# Altium PCB Liquid_level.PcbDoc
Units mm, origin at the board's own origin, x right, y up, seen from the top; angles counter-clockwise.
Board outline 23.94 x 68.42 mm, 2 copper layers (Top Layer, Bottom Layer); 4 components, 5 nets, 10 pads, 0 vias.
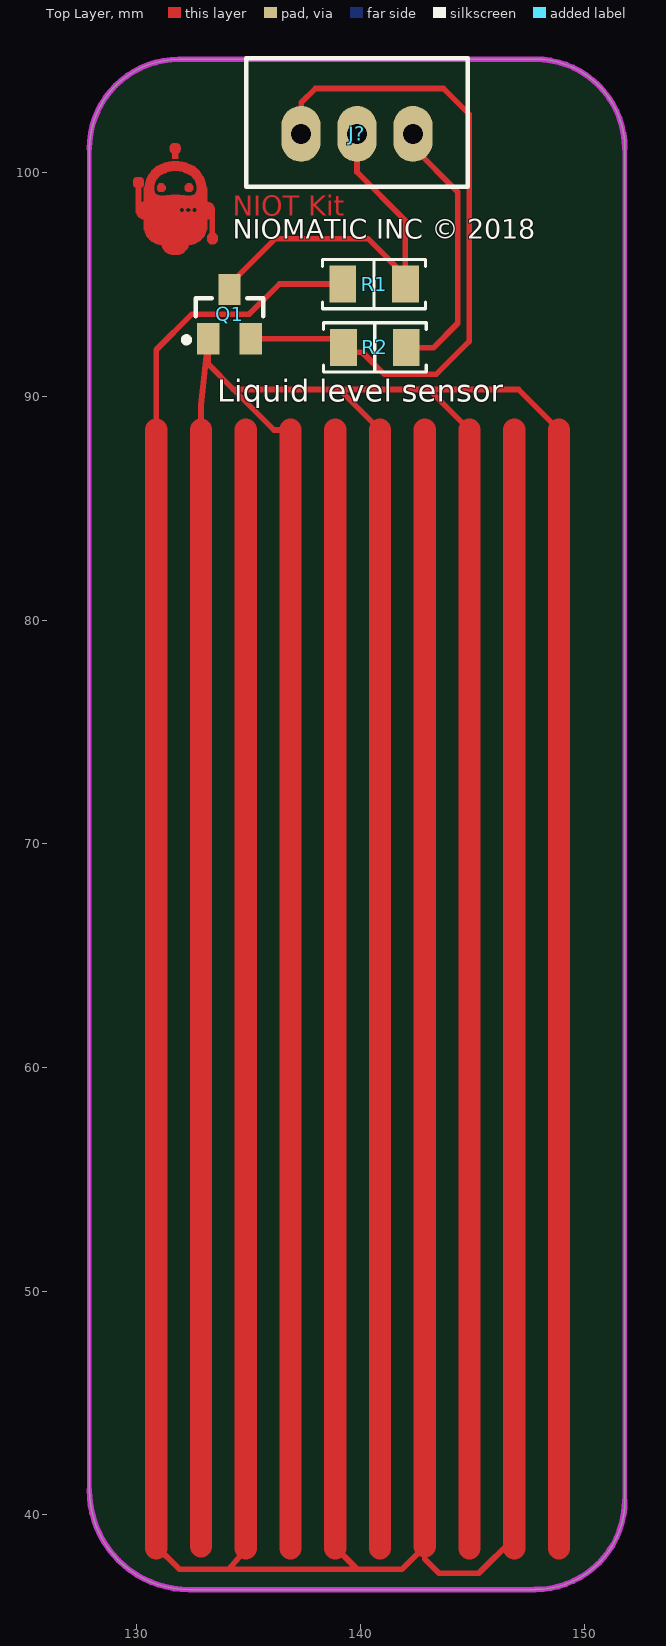
[diagram p0: Top Layer view]
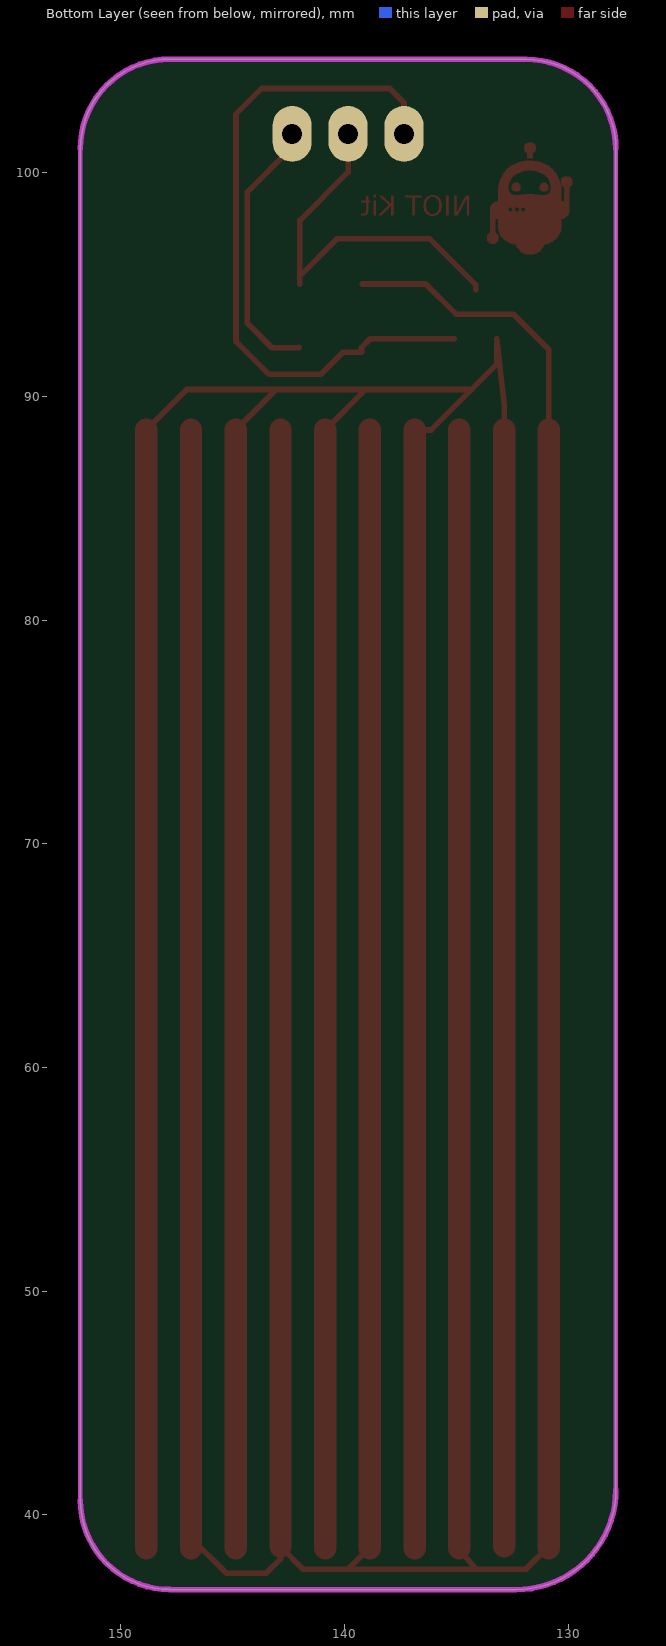
[diagram p1: Bottom Layer view, seen from below]
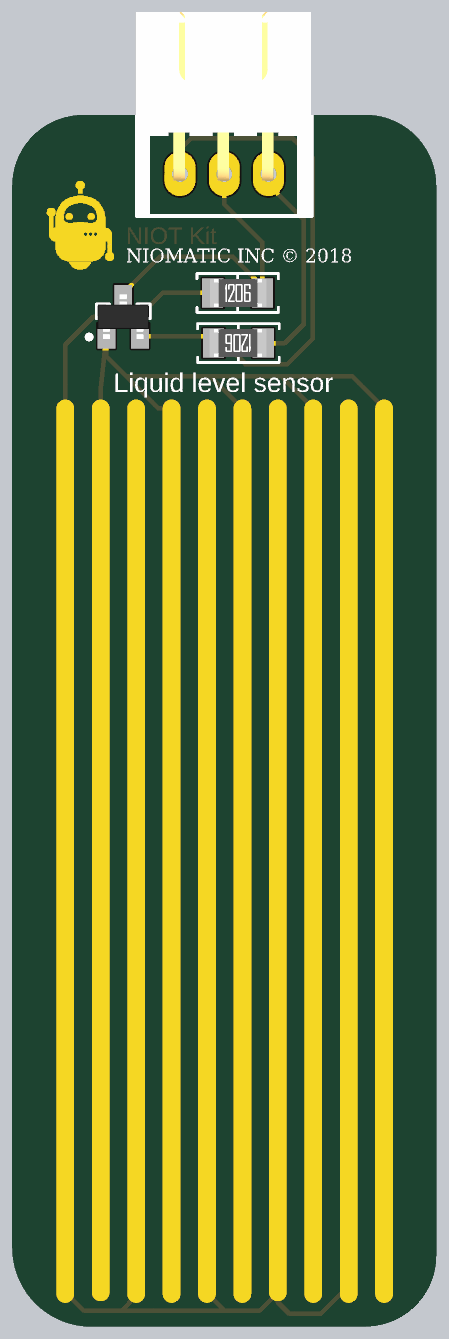
[diagram p2: 3D render of the assembled board from above, using the file's embedded part models]

## Layer stack, top to bottom
Top Solder: solder mask 0.0102, Solder Resist, Dk 3.5
Top Layer: signal copper 0.0356
Dielectric 1: dielectric 0.32, FR-4, Dk 4.8
Bottom Layer: signal copper 0.0356
Bottom Solder: solder mask 0.0102, Solder Resist, Dk 3.5

## Board outline
127.876,41.117 127.876,101.065 cw(c131.876,101.065) 131.876,105.065 131.876,105.074 147.816,105.074 cw(c147.816,101.074) 151.816,101.074 151.816,40.664 cw(c147.816,40.664) 147.816,36.664 147.816,36.655 132.339,36.655 cw(c132.339,41.117)

## Design rules (kind name [scope] priority, off if disabled: settings)
Clearance [All] p1: gap=0.254 ignorepadtopadclearanceinfootprint=FALSE except(0: Arc-Hole Track-Hole SMDPad-Hole THPad-Hole Via-Hole Fill-Hole Poly-Hole Region-Hole Text-Hole)
PolygonConnect [All] p1: connectstyle=Relief reliefconductorwidth=0.254 reliefentries=4 polygonreliefangle="90 Angle" airgapwidth=0.254
RoomDefinition Liquid_level [InComponentClass('Liquid_level')] p1: confinementstyle=ConfineIn formatcopy=TRUE lockcomponents=FALSE outline 0,0 50.8,0 50.8,25.4 0,25.4
RoutingVias [All] p1: holewidth=0.711 width=1.27 viastyle="Through Hole" minholewidth=0.711 minwidth=1.27 maxholewidth=0.711 maxwidth=1.27
SolderMaskExpansion [All] p1: expansion=0.102
Width [All] p1: maxlimit=0.254 minlimit=0.254 preferedwidth=0.254
30 further rules are at their usual default settings.

## Components (designator, comment, footprint, x,y, rotation, side; value= is the part's Value field where it differs from the comment)
J? "Header" "JST XH B3B-XH-A - RIGHT" 139.846,101.736 r180 top
Q1 "2N3904" SOT23 134.144,93.678 r90 top
R1 "100R" "RES 1206/3216" 140.604,95.018 r0 top value=1K
R2 "10K" "RES 1206/3216" 140.644,92.188 r180 top value=1K

## Footprints (in the part's own frame and the unit in brackets; to place one, negate y for a bottom-side part, rotate by r counter-clockwise, add the part's x,y. Pads: shape width x height; smd on the part's side, far side on the other; paste and mask are expansions set on the pad)
"JST XH B3B-XH-A - RIGHT" [mm]
  oval 1.75x2.5 hole 0.9: 1(-2.5,0) 2(0,0) 3(2.5,0)
  silkscreen extent -4.95,-3.38 4.95,2.38, body extent -4.9,-9.15 5,2.35, height 6.1
"RES 1206/3216" [mm] "Chip Resistor, 2-Leads, Body 3.13x1.55mm, IPC Medium Density"
  rect 1.2x1.65 smd: 1(-1.4,0) 2(1.4,0)
  silkscreen extent -2.3,-1.1 2.3,1.1, body extent -1.57,-0.8 1.62,0.8, height 0.6
SOT23 [mm]
  rect 1.4x1 smd: B(-1.1,0.95) C(1.1,0) E(-1.1,-0.95)
  silkscreen extent -1.27,-1.5 0.7,2.05, body extent -1.27,-1.46 1.27,1.46, height 1

## Part data
J?: library part "3 Pin"
Q1: library part 2N2222, "NPN", De="Seyed Mohsen Ghasemian", E-mail=picpars@gmail.com, web=www.picpars.com
R1 R2: library part Resistor, "SMT Resistor"

## Nets (pads, with @x,y where several pads share a name; then routed paths per layer and width w, separated by ;. In a path a pad name is that pad's centre, name@x,y a point inside that pad or via, vN(x,y) a via of type N, cw(c..) or ccw(c..) an arc to the next point about the centre after c; other vN are vias at no path point)
GND: J?.1 R2.1 | length 12.1
  Top Layer w0.254: R2.1 142.044,92.177 143.256,92.177 144.348,93.269 144.348,99.141 142.346,101.143 J?.1
PROBE1: Q1.B | length 280.5
  Top Layer w0.254: 132.871,88.5 132.871,89.621 Q1.B 133.194,91.44 134.324,90.31 ; 136.871,88.5 136.134,88.5 134.324,90.31 ; 140.871,88.5 139.061,90.31 ; 144.871,88.5 143.061,90.31 ; 148.871,88.5 147.061,90.31 143.061,90.31 ; 134.324,90.31 139.061,90.31 ; 139.061,90.31 143.061,90.31
  Top Layer w1: 132.871,38.59 132.871,88.5 ; 136.871,38.5 136.871,88.5 ; 140.871,38.5 140.871,88.5 ; 144.871,38.5 144.871,88.5 ; 148.871,38.5 148.871,88.5
PROBE2: R1.1 | length 533.3
  Top Layer w0.254: 134.871,88.5 134.871,38.5 134.871,38.45 134.112,37.567 ; 138.871,88.5 138.871,38.548 139.852,37.567 ; R1.1 139.204,95.021 136.373,95.021 135.026,93.675 132.461,93.675 130.871,92.085 130.871,88.5 130.871,38.598 131.902,37.567 134.112,37.567 ; 142.871,88.5 142.871,38.59 142.871,38.579 ; 146.871,88.5 146.871,38.972 145.288,37.389 143.51,37.389 142.871,38.028 142.871,38.579 ; 134.112,37.567 139.852,37.567 ; 139.852,37.567 141.859,37.567 142.871,38.579
  Top Layer w1: 130.871,38.5 130.871,88.5 ; 134.871,38.5 134.871,88.5 ; 138.871,38.5 138.871,88.5 ; 142.871,38.59 142.871,88.5 ; 146.871,38.5 146.871,88.5
SIG: J?.3 Q1.E R2.2 | length 31
  Top Layer w0.254: Q1.E 138.854,92.578 R2.2 139.244,91.973 140.08,91.973 141.072,90.982 143.382,90.982 144.856,92.456 144.856,102.616 143.713,103.759 137.981,103.759 137.346,103.124 J?.3
VCC: J?.2 Q1.C R1.2 | length 17.2
  Top Layer w0.254: Q1.C 134.144,94.994 136.2,97.05 140.33,97.05 R1.2@142.004,95.376 ; J?.2 139.846,100.024 142.004,97.866 R1.2@142.004,95.376 ; R1.2 R1.2@142.004,95.376
copper on no net: | length 380
  Top Layer w0.025: 129.836,99.469 130.319,99.469 ; 129.836,99.495 130.319,99.495 ; 129.836,99.52 130.319,99.52 ; 129.836,99.545 130.319,99.545 ; 129.836,99.571 130.319,99.571 ; 129.836,99.596 130.319,99.596 ; 129.836,99.622 130.319,99.622 ; 129.836,99.647 130.319,99.647 ; 129.836,99.672 130.319,99.672 ; 129.862,99.418 130.294,99.418 ; 129.862,99.444 130.294,99.444 ; 129.862,99.698 130.294,99.698 ; 129.862,99.723 130.294,99.723 ; 129.887,99.393 130.268,99.393 ; 129.887,99.749 130.268,99.749 ; 129.913,99.368 130.243,99.368 ; 129.913,99.774 130.243,99.774 ; 129.963,98.225 133.494,98.225 ; 129.963,98.25 131.97,98.25 ; 129.963,98.275 131.945,98.275 ; 129.963,98.301 131.919,98.301 ; 129.963,98.326 131.919,98.326 ; 129.963,98.352 131.919,98.352 ; 129.963,98.377 131.919,98.377 ; 129.963,98.402 131.945,98.402 ; 129.963,98.428 131.97,98.428 ; 129.963,98.453 133.469,98.453 ; 129.963,98.479 133.469,98.479 ; 129.963,98.504 133.443,98.504 ; 129.963,98.529 133.443,98.529 ; 129.963,98.555 133.418,98.555 ; 129.963,98.58 133.392,98.58 ; 129.963,98.606 133.367,98.606 ; 129.963,98.631 133.342,98.631 ; 129.963,98.656 133.316,98.656 ; 129.963,98.682 133.265,98.682 ; 129.963,98.707 130.192,98.707 ; 129.963,98.733 130.192,98.733 ; 129.963,98.758 130.192,98.758 ; 129.963,98.783 130.192,98.783 ; 129.963,98.809 130.192,98.809 ; 129.963,98.834 130.192,98.834 ; 129.963,98.86 130.192,98.86 ; 129.963,98.885 130.192,98.885 ; 129.963,98.91 130.192,98.91 ; 129.963,98.936 130.192,98.936 ; 129.963,98.961 130.192,98.961 ; 129.963,98.987 130.192,98.987 ; 129.963,99.012 130.192,99.012 ; 129.963,99.037 130.192,99.037 ; 129.963,99.063 130.192,99.063 ; 129.963,99.088 130.192,99.088 ; 129.963,99.114 130.192,99.114 ; 129.963,99.139 130.192,99.139 ; 129.963,99.164 130.192,99.164 ; 129.963,99.19 130.192,99.19 ; 129.963,99.215 130.192,99.215 ; 129.963,99.241 130.192,99.241 ; 129.963,99.266 130.192,99.266 ; 129.963,99.291 130.192,99.291 ; 129.963,99.317 130.192,99.317 ; 129.963,99.342 130.192,99.342 ; 129.963,99.799 130.192,99.799 ; 129.989,98.148 133.494,98.148 ; 129.989,98.174 133.494,98.174 ; 129.989,98.199 133.494,98.199 ; 130.014,98.123 133.494,98.123 ; 130.04,98.072 133.494,98.072 ; 130.04,98.098 133.494,98.098 ; 130.065,98.047 133.494,98.047 ; 130.09,98.021 133.494,98.021 ; 130.116,97.996 133.494,97.996 ; 130.167,97.971 133.494,97.971 ; 130.217,97.945 133.24,97.945 ; 130.268,98.707 133.164,98.707 ; 130.319,97.463 133.138,97.463 ; 130.319,97.488 133.138,97.488 ; 130.319,97.513 133.138,97.513 ; 130.319,97.539 133.138,97.539 ; 130.319,97.564 133.138,97.564 ; 130.319,97.59 133.138,97.59 ; 130.319,97.615 133.138,97.615 ; 130.319,97.64 133.138,97.64 ; 130.319,97.666 133.138,97.666 ; 130.319,97.691 133.138,97.691 ; 130.319,97.717 133.138,97.717 ; 130.319,97.742 133.138,97.742 ; 130.319,97.767 133.138,97.767 ; 130.319,97.793 133.138,97.793 ; 130.319,97.818 133.138,97.818 ; 130.319,97.844 133.138,97.844 ; 130.319,97.869 133.138,97.869 ; 130.319,97.894 133.138,97.894 ; 130.319,97.92 133.138,97.92 ; 130.319,98.733 133.138,98.733 ; 130.319,98.758 133.138,98.758 ; 130.319,98.783 133.138,98.783 ; 130.319,98.809 133.138,98.809 ; 130.319,98.834 133.138,98.834 ; 130.319,98.86 133.138,98.86 ; 130.319,98.885 133.138,98.885 ; 130.319,98.91 133.138,98.91 ; 130.319,98.936 133.138,98.936 ; 130.319,98.961 133.138,98.961 ; 130.319,98.987 131.005,98.987 ; 130.319,99.012 130.929,99.012 ; 130.319,99.037 130.878,99.037 ; 130.319,99.063 130.852,99.063 ; 130.319,99.088 130.827,99.088 ; 130.319,99.114 130.802,99.114 ; 130.319,99.139 130.802,99.139 ; 130.319,99.164 130.776,99.164 ; 130.319,99.19 130.776,99.19 ; 130.319,99.215 130.776,99.215 ; 130.319,99.241 130.776,99.241 ; 130.319,99.266 130.776,99.266 ; 130.319,99.291 130.776,99.291 ; 130.319,99.317 130.776,99.317 ; 130.319,99.342 130.776,99.342 ; 130.344,97.361 133.088,97.361 ; 130.344,97.386 133.113,97.386 ; 130.344,97.412 133.113,97.412 ; 130.344,97.437 133.113,97.437 ; 130.344,99.368 130.776,99.368 ; 130.344,99.393 130.776,99.393 ; 130.344,99.418 130.776,99.418 ; 130.344,99.444 130.776,99.444 ; 130.37,97.31 133.088,97.31 ; 130.37,97.336 133.088,97.336 ; 130.37,99.469 130.776,99.469 ; 130.37,99.495 130.802,99.495 ; 130.37,99.52 130.802,99.52 ; 130.37,99.545 130.802,99.545 ; 130.395,97.259 133.062,97.259 ; 130.395,97.285 133.062,97.285 ; 130.395,99.571 130.827,99.571 ; 130.395,99.596 130.827,99.596 ; 130.395,99.622 130.827,99.622 ; 130.421,97.209 133.037,97.209 ; 130.421,97.234 133.037,97.234 ; 130.421,99.647 130.852,99.647 ; 130.421,99.672 130.878,99.672 ; 130.421,99.698 130.878,99.698 ; 130.446,97.158 133.011,97.158 ; 130.446,97.183 133.011,97.183 ; 130.446,99.723 130.903,99.723 ; 130.446,99.749 130.903,99.749 ; 130.471,97.132 132.986,97.132 ; 130.471,99.774 130.929,99.774 ; 130.471,99.799 130.954,99.799 ; 130.497,97.107 132.961,97.107 ; 130.497,99.825 130.979,99.825 ; 130.497,99.85 131.005,99.85 ; 130.522,97.082 132.935,97.082 ; 130.522,99.876 131.03,99.876 ; 130.522,99.901 131.081,99.901 ; 130.548,97.031 132.884,97.031 ; 130.548,97.056 132.91,97.056 ; 130.548,99.926 131.106,99.926 ; 130.573,99.952 131.157,99.952 ; 130.573,99.977 131.208,99.977 ; 130.598,97.005 132.859,97.005 ; 130.598,100.003 131.284,100.003 ; 130.624,96.98 132.834,96.98 ; 130.624,100.028 131.335,100.028 ; 130.649,96.955 132.808,96.955 ; 130.649,100.053 131.437,100.053 ; 130.649,100.079 131.564,100.079 ; 130.675,96.929 132.757,96.929 ; 130.675,100.104 132.783,100.104 ; 130.7,100.13 132.757,100.13 ; 130.725,96.904 132.732,96.904 ; 130.725,100.155 132.732,100.155 ; 130.751,100.18 132.707,100.18 ; 130.776,96.878 132.681,96.878 ; 130.776,100.206 132.681,100.206 ; 130.827,96.853 132.63,96.853 ; 130.827,100.231 132.63,100.231 ; 130.852,100.257 132.605,100.257 ; 130.878,100.282 132.58,100.282 ; 130.903,96.828 132.554,96.828 ; 130.903,99.266 131.284,99.266 ; 130.903,99.291 131.284,99.291 ; 130.903,99.317 131.284,99.317 ; 130.903,99.342 131.284,99.342 ; 130.903,99.368 131.284,99.368 ; 130.903,99.393 131.284,99.393 ; 130.903,99.418 131.259,99.418 ; 130.929,99.215 131.233,99.215 ; 130.929,99.241 131.259,99.241 ; 130.929,99.444 131.259,99.444 ; 130.929,100.307 132.529,100.307 ; 130.954,99.19 131.233,99.19 ; 130.954,99.469 131.233,99.469 ; 130.979,99.495 131.208,99.495 ; 130.979,100.333 132.478,100.333 ; 131.005,96.802 132.453,96.802 ; 131.005,99.164 131.183,99.164 ; 131.005,99.52 131.157,99.52 ; 131.03,100.358 132.427,100.358 ; 131.081,100.384 132.376,100.384 ; 131.106,96.726 132.3,96.726 ; 131.106,96.751 132.326,96.751 ; 131.132,96.675 132.3,96.675 ; 131.132,96.701 132.3,96.701 ; 131.132,100.409 132.3,100.409 ; 131.157,96.624 132.249,96.624 ; 131.157,96.65 132.275,96.65 ; 131.183,96.599 132.249,96.599 ; 131.208,96.574 132.224,96.574 ; 131.208,100.434 132.249,100.434 ; 131.233,96.523 132.173,96.523 ; 131.233,96.548 132.199,96.548 ; 131.259,96.497 132.148,96.497 ; 131.284,96.472 132.122,96.472 ; 131.31,98.987 132.148,98.987 ; 131.31,100.46 132.148,100.46 ; 131.335,96.447 132.097,96.447 ; 131.36,96.421 132.072,96.421 ; 131.411,96.396 132.021,96.396 ; 131.411,100.485 132.046,100.485 ; 131.462,96.37 131.97,96.37 ; 131.462,101.019 131.945,101.019 ; 131.462,101.044 131.97,101.044 ; 131.462,101.069 131.97,101.069 ; 131.462,101.095 131.97,101.095 ; 131.462,101.12 131.97,101.12 ; 131.462,101.146 131.97,101.146 ; 131.462,101.171 131.945,101.171 ; 131.487,100.968 131.945,100.968 ; 131.487,100.993 131.945,100.993 ; 131.487,101.196 131.945,101.196 ; 131.487,101.222 131.945,101.222 ; 131.513,100.942 131.919,100.942 ; 131.513,101.247 131.919,101.247 ; 131.538,96.345 131.894,96.345 ; 131.538,99.012 131.919,99.012 ; 131.538,100.917 131.894,100.917 ; 131.538,101.273 131.894,101.273 ; 131.564,100.511 131.894,100.511 ; 131.564,100.892 131.868,100.892 ; 131.564,101.298 131.868,101.298 ; 131.589,100.638 131.843,100.638 ; 131.589,100.663 131.843,100.663 ; 131.589,100.688 131.843,100.688 ; 131.589,100.714 131.843,100.714 ; 131.589,100.739 131.843,100.739 ; 131.589,100.765 131.843,100.765 ; 131.589,100.79 131.843,100.79 ; 131.589,100.815 131.843,100.815 ; 131.589,100.841 131.843,100.841 ; 131.589,100.866 131.843,100.866 ; 131.589,101.323 131.818,101.323 ; 131.894,100.079 132.783,100.079 ; 132.021,100.053 132.808,100.053 ; 132.046,98.428 132.249,98.428 ; 132.072,98.25 132.249,98.25 ; 132.097,98.275 132.224,98.275 ; 132.097,98.301 132.199,98.301 ; 132.097,98.377 132.199,98.377 ; 132.097,98.402 132.224,98.402 ; 132.097,100.028 132.834,100.028 ; 132.122,98.326 132.199,98.326 ; 132.122,98.352 132.199,98.352 ; 132.148,99.266 132.529,99.266 ; 132.148,99.291 132.529,99.291 ; 132.148,99.317 132.529,99.317 ; 132.148,99.342 132.529,99.342 ; 132.148,99.368 132.529,99.368 ; 132.148,99.393 132.529,99.393 ; 132.148,99.418 132.503,99.418 ; 132.173,99.215 132.478,99.215 ; 132.173,99.241 132.503,99.241 ; 132.173,99.444 132.503,99.444 ; 132.173,100.003 132.859,100.003 ; 132.199,99.19 132.453,99.19 ; 132.199,99.469 132.478,99.469 ; 132.224,99.495 132.453,99.495 ; 132.249,99.164 132.427,99.164 ; 132.249,99.52 132.402,99.52 ; 132.249,99.977 132.884,99.977 ; 132.3,99.952 132.884,99.952 ; 132.326,99.926 132.91,99.926 ; 132.351,98.25 132.529,98.25 ; 132.351,98.428 132.529,98.428 ; 132.376,98.275 132.503,98.275 ; 132.376,98.402 132.503,98.402 ; 132.376,99.901 132.91,99.901 ; 132.402,98.301 132.478,98.301 ; 132.402,98.326 132.478,98.326 ; 132.402,98.352 132.478,98.352 ; 132.402,98.377 132.503,98.377 ; 132.402,99.876 132.935,99.876 ; 132.453,98.987 133.138,98.987 ; 132.453,99.85 132.961,99.85 ; 132.478,99.825 132.961,99.825 ; 132.503,99.799 132.986,99.799 ; 132.529,99.012 133.138,99.012 ; 132.529,99.749 133.011,99.749 ; 132.529,99.774 132.986,99.774 ; 132.554,99.723 133.011,99.723 ; 132.58,99.037 133.138,99.037 ; 132.58,99.672 133.037,99.672 ; 132.58,99.698 133.011,99.698 ; 132.605,99.063 133.138,99.063 ; 132.605,99.622 133.062,99.622 ; 132.605,99.647 133.037,99.647 ; 132.63,98.25 133.494,98.25 ; 132.63,98.428 133.494,98.428 ; 132.63,99.088 133.138,99.088 ; 132.63,99.114 133.138,99.114 ; 132.63,99.545 133.088,99.545 ; 132.63,99.571 133.062,99.571 ; 132.63,99.596 133.062,99.596 ; 132.656,98.275 133.494,98.275 ; 132.656,98.402 133.494,98.402 ; 132.656,99.139 133.138,99.139 ; 132.656,99.164 133.138,99.164 ; 132.656,99.469 133.088,99.469 ; 132.656,99.495 133.088,99.495 ; 132.656,99.52 133.088,99.52 ; 132.681,98.301 133.494,98.301 ; 132.681,98.326 133.494,98.326 ; 132.681,98.352 133.494,98.352 ; 132.681,98.377 133.494,98.377 ; 132.681,99.19 133.138,99.19 ; 132.681,99.215 133.138,99.215 ; 132.681,99.241 133.138,99.241 ; 132.681,99.266 133.138,99.266 ; 132.681,99.291 133.138,99.291 ; 132.681,99.317 133.138,99.317 ; 132.681,99.342 133.113,99.342 ; 132.681,99.368 133.113,99.368 ; 132.681,99.393 133.113,99.393 ; 132.681,99.418 133.113,99.418 ; 132.681,99.444 133.113,99.444 ; 133.138,96.98 133.621,96.98 ; 133.138,97.005 133.621,97.005 ; 133.138,97.031 133.621,97.031 ; 133.138,97.056 133.621,97.056 ; 133.138,97.082 133.621,97.082 ; 133.138,97.107 133.621,97.107 ; 133.138,97.132 133.621,97.132 ; 133.138,97.158 133.621,97.158 ; 133.138,97.183 133.621,97.183 ; 133.164,96.929 133.596,96.929 ; 133.164,96.955 133.621,96.955 ; 133.164,97.209 133.596,97.209 ; 133.189,96.904 133.57,96.904 ; 133.189,97.234 133.57,97.234 ; 133.215,96.878 133.545,96.878 ; 133.215,97.259 133.545,97.259 ; 133.24,96.853 133.519,96.853 ; 133.24,97.285 133.519,97.285 ; 133.265,97.31 133.494,97.31 ; 133.265,97.336 133.494,97.336 ; 133.265,97.361 133.494,97.361 ; 133.265,97.386 133.494,97.386 ; 133.265,97.412 133.494,97.412 ; 133.265,97.437 133.494,97.437 ; 133.265,97.463 133.494,97.463 ; 133.265,97.488 133.494,97.488 ; 133.265,97.513 133.494,97.513 ; 133.265,97.539 133.494,97.539 ; 133.265,97.564 133.494,97.564 ; 133.265,97.59 133.494,97.59 ; 133.265,97.615 133.494,97.615 ; 133.265,97.64 133.494,97.64 ; 133.265,97.666 133.494,97.666 ; 133.265,97.691 133.494,97.691 ; 133.265,97.717 133.494,97.717 ; 133.265,97.742 133.494,97.742 ; 133.265,97.767 133.494,97.767 ; 133.265,97.793 133.494,97.793 ; 133.265,97.818 133.494,97.818 ; 133.265,97.844 133.494,97.844 ; 133.265,97.869 133.494,97.869 ; 133.265,97.894 133.494,97.894 ; 133.265,97.92 133.494,97.92 ; 133.265,97.945 133.494,97.945 ; 133.291,96.828 133.469,96.828

## Keep-outs
Keep-Out Layer:
  lines w0.203: 127.876,41.117 127.876,101.065 ; 151.816,40.664 151.816,101.074
  lines w0.254: 127.876,41.117 ccw(c132.339,41.117) 132.339,36.655 147.816,36.655 ; 127.876,101.065 cw(c131.876,101.065) 131.876,105.065 ; 131.876,105.074 147.816,105.074 cw(c147.816,101.074) 151.816,101.074 ; 147.816,36.664 ccw(c147.816,40.664) 151.816,40.664

## Other copper
Top Layer:
  region: 143.785,56.55
  region: 127.475,56.82
  text "NIOT Kit" at 134.29,97.79 h1.52

## Silkscreen, mask and mechanical layers (free items; w line width, h text height)
Top Overlay:
  text "NIOMATIC INC © 2018" at 134.29,96.75 h1.5
  text "Liquid level sensor" at 133.59,89.43 h1.7